# Altium PCB MT-CHARHER  V1.0.0.PcbDoc (part 1 of 2)
Units mm, origin at the board's own origin, x right, y up, seen from the top; angles counter-clockwise.
Board outline 160.02 x 112.01 mm, 2 copper layers (Top Layer, Bottom Layer); 298 components, 195 nets, 918 pads, 681 vias.
Unrouted connection lines stored in the file: 1.
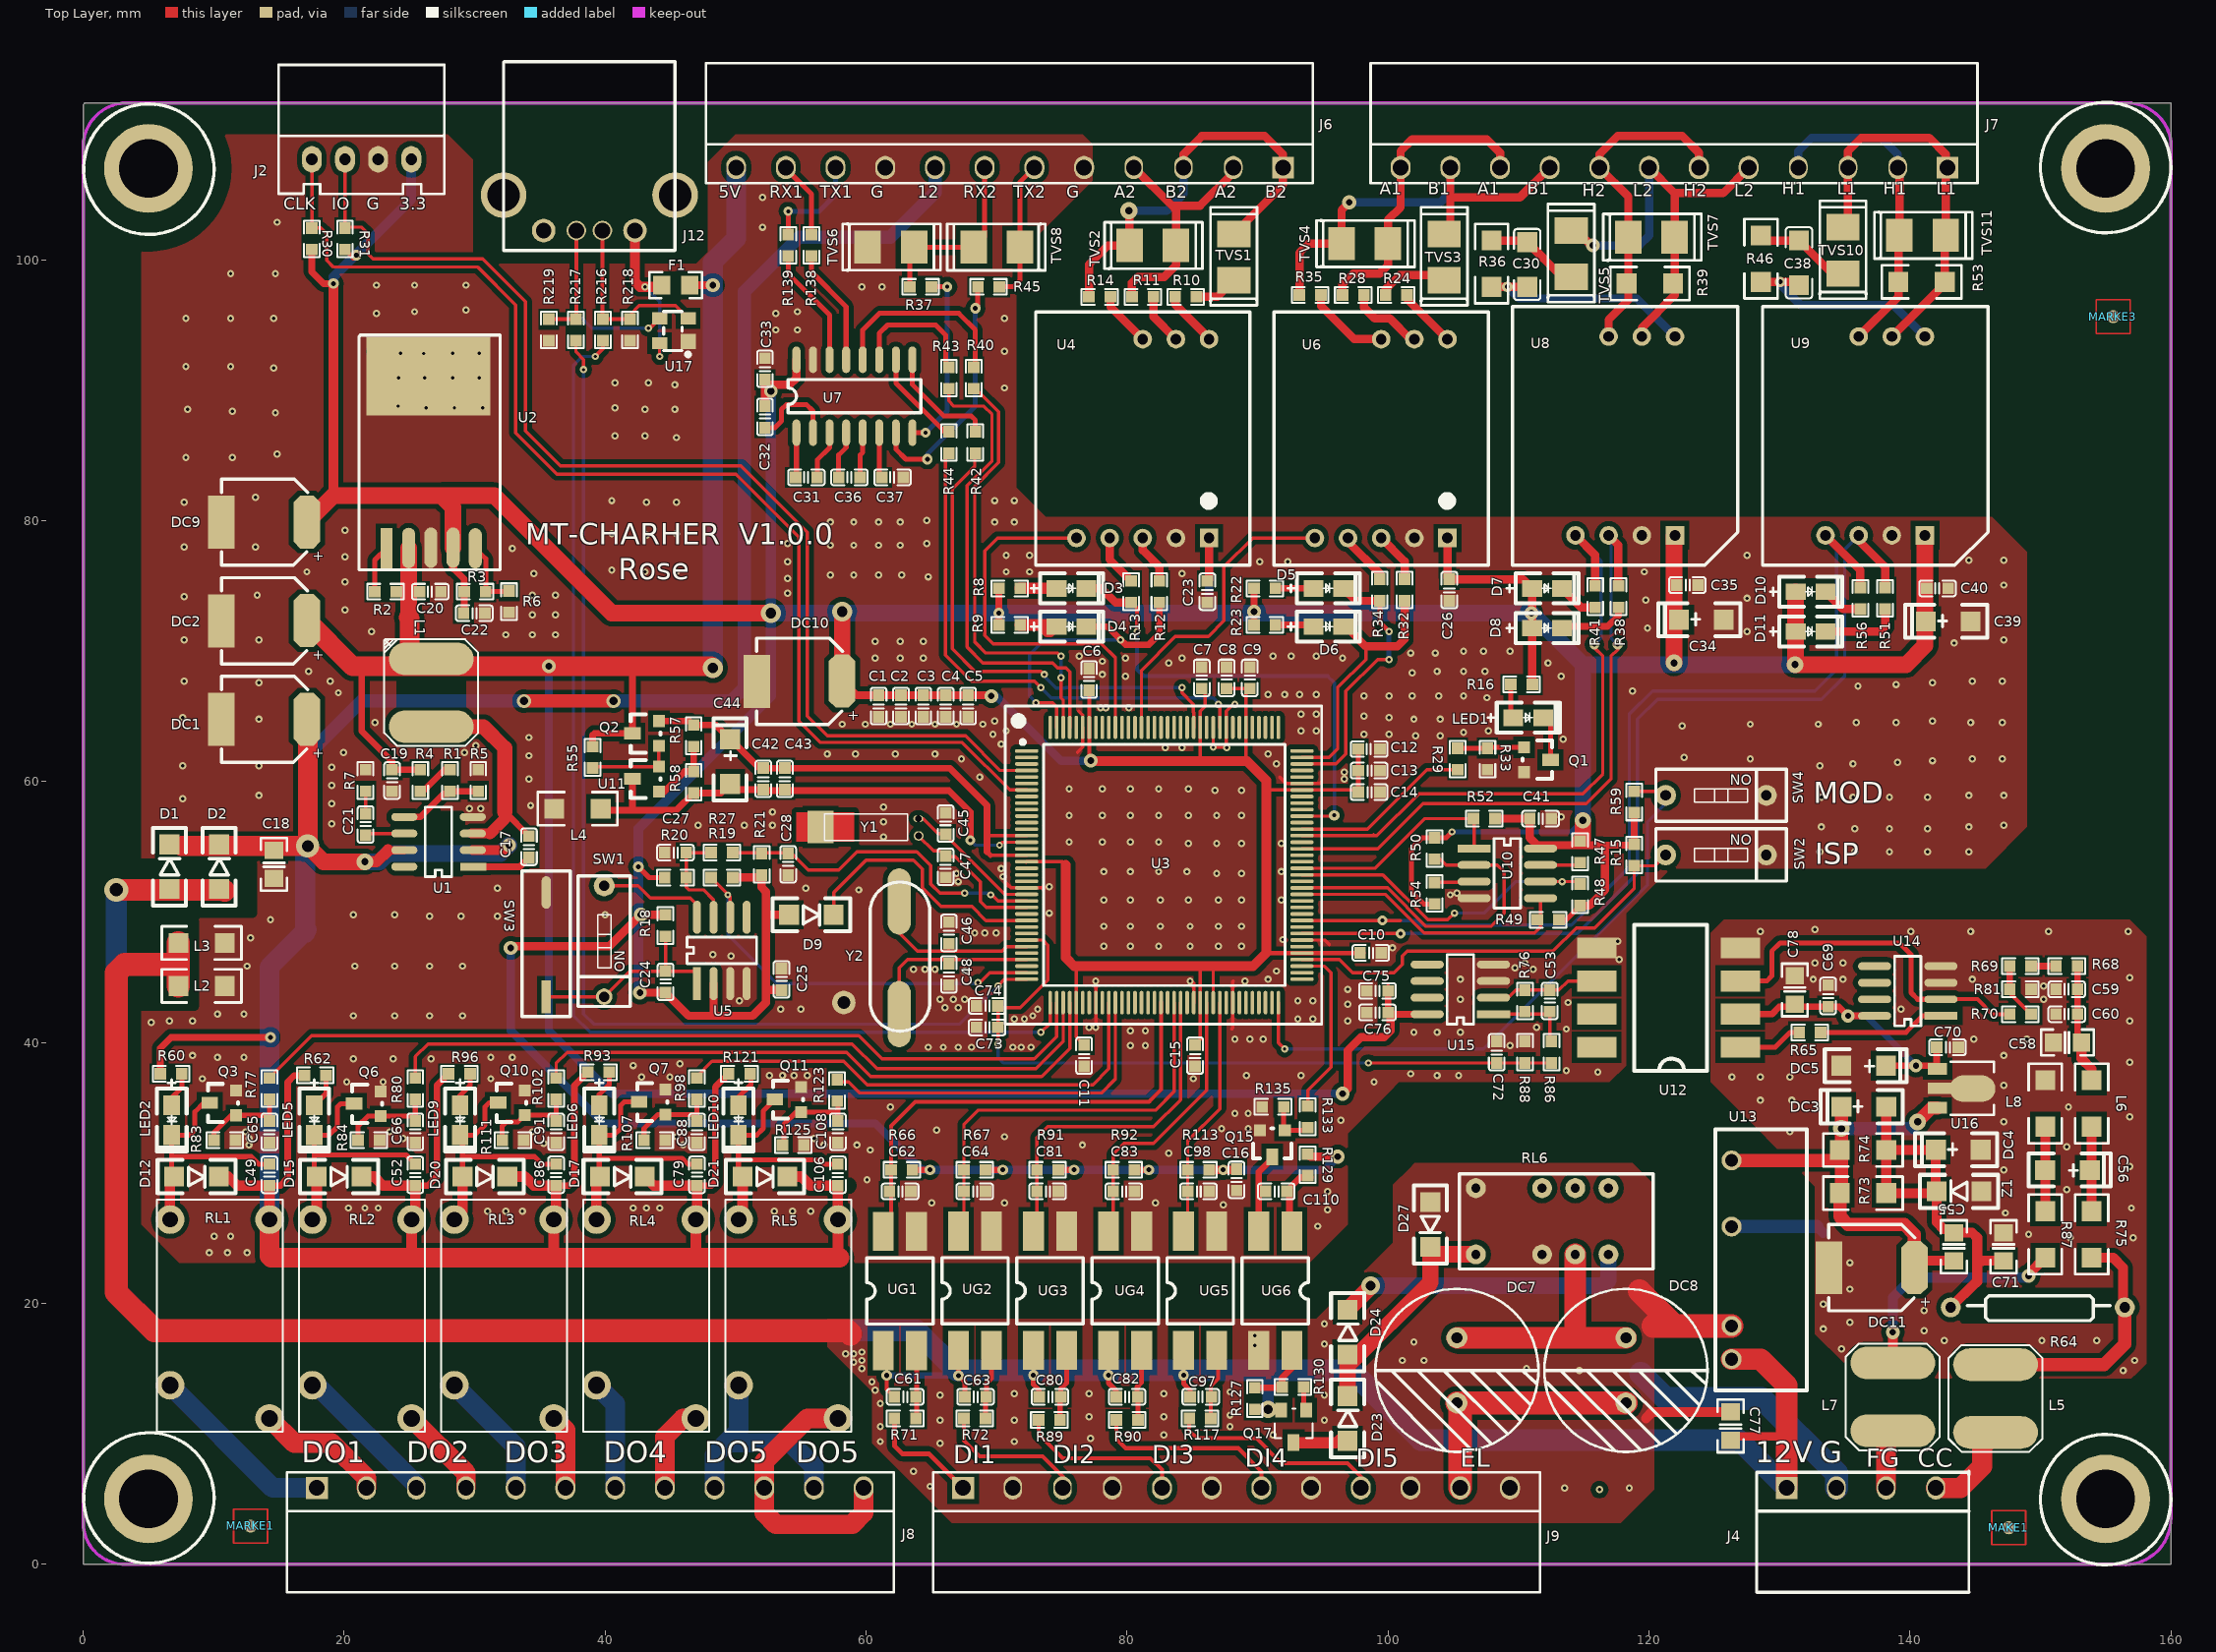
[diagram p0: Top Layer view]
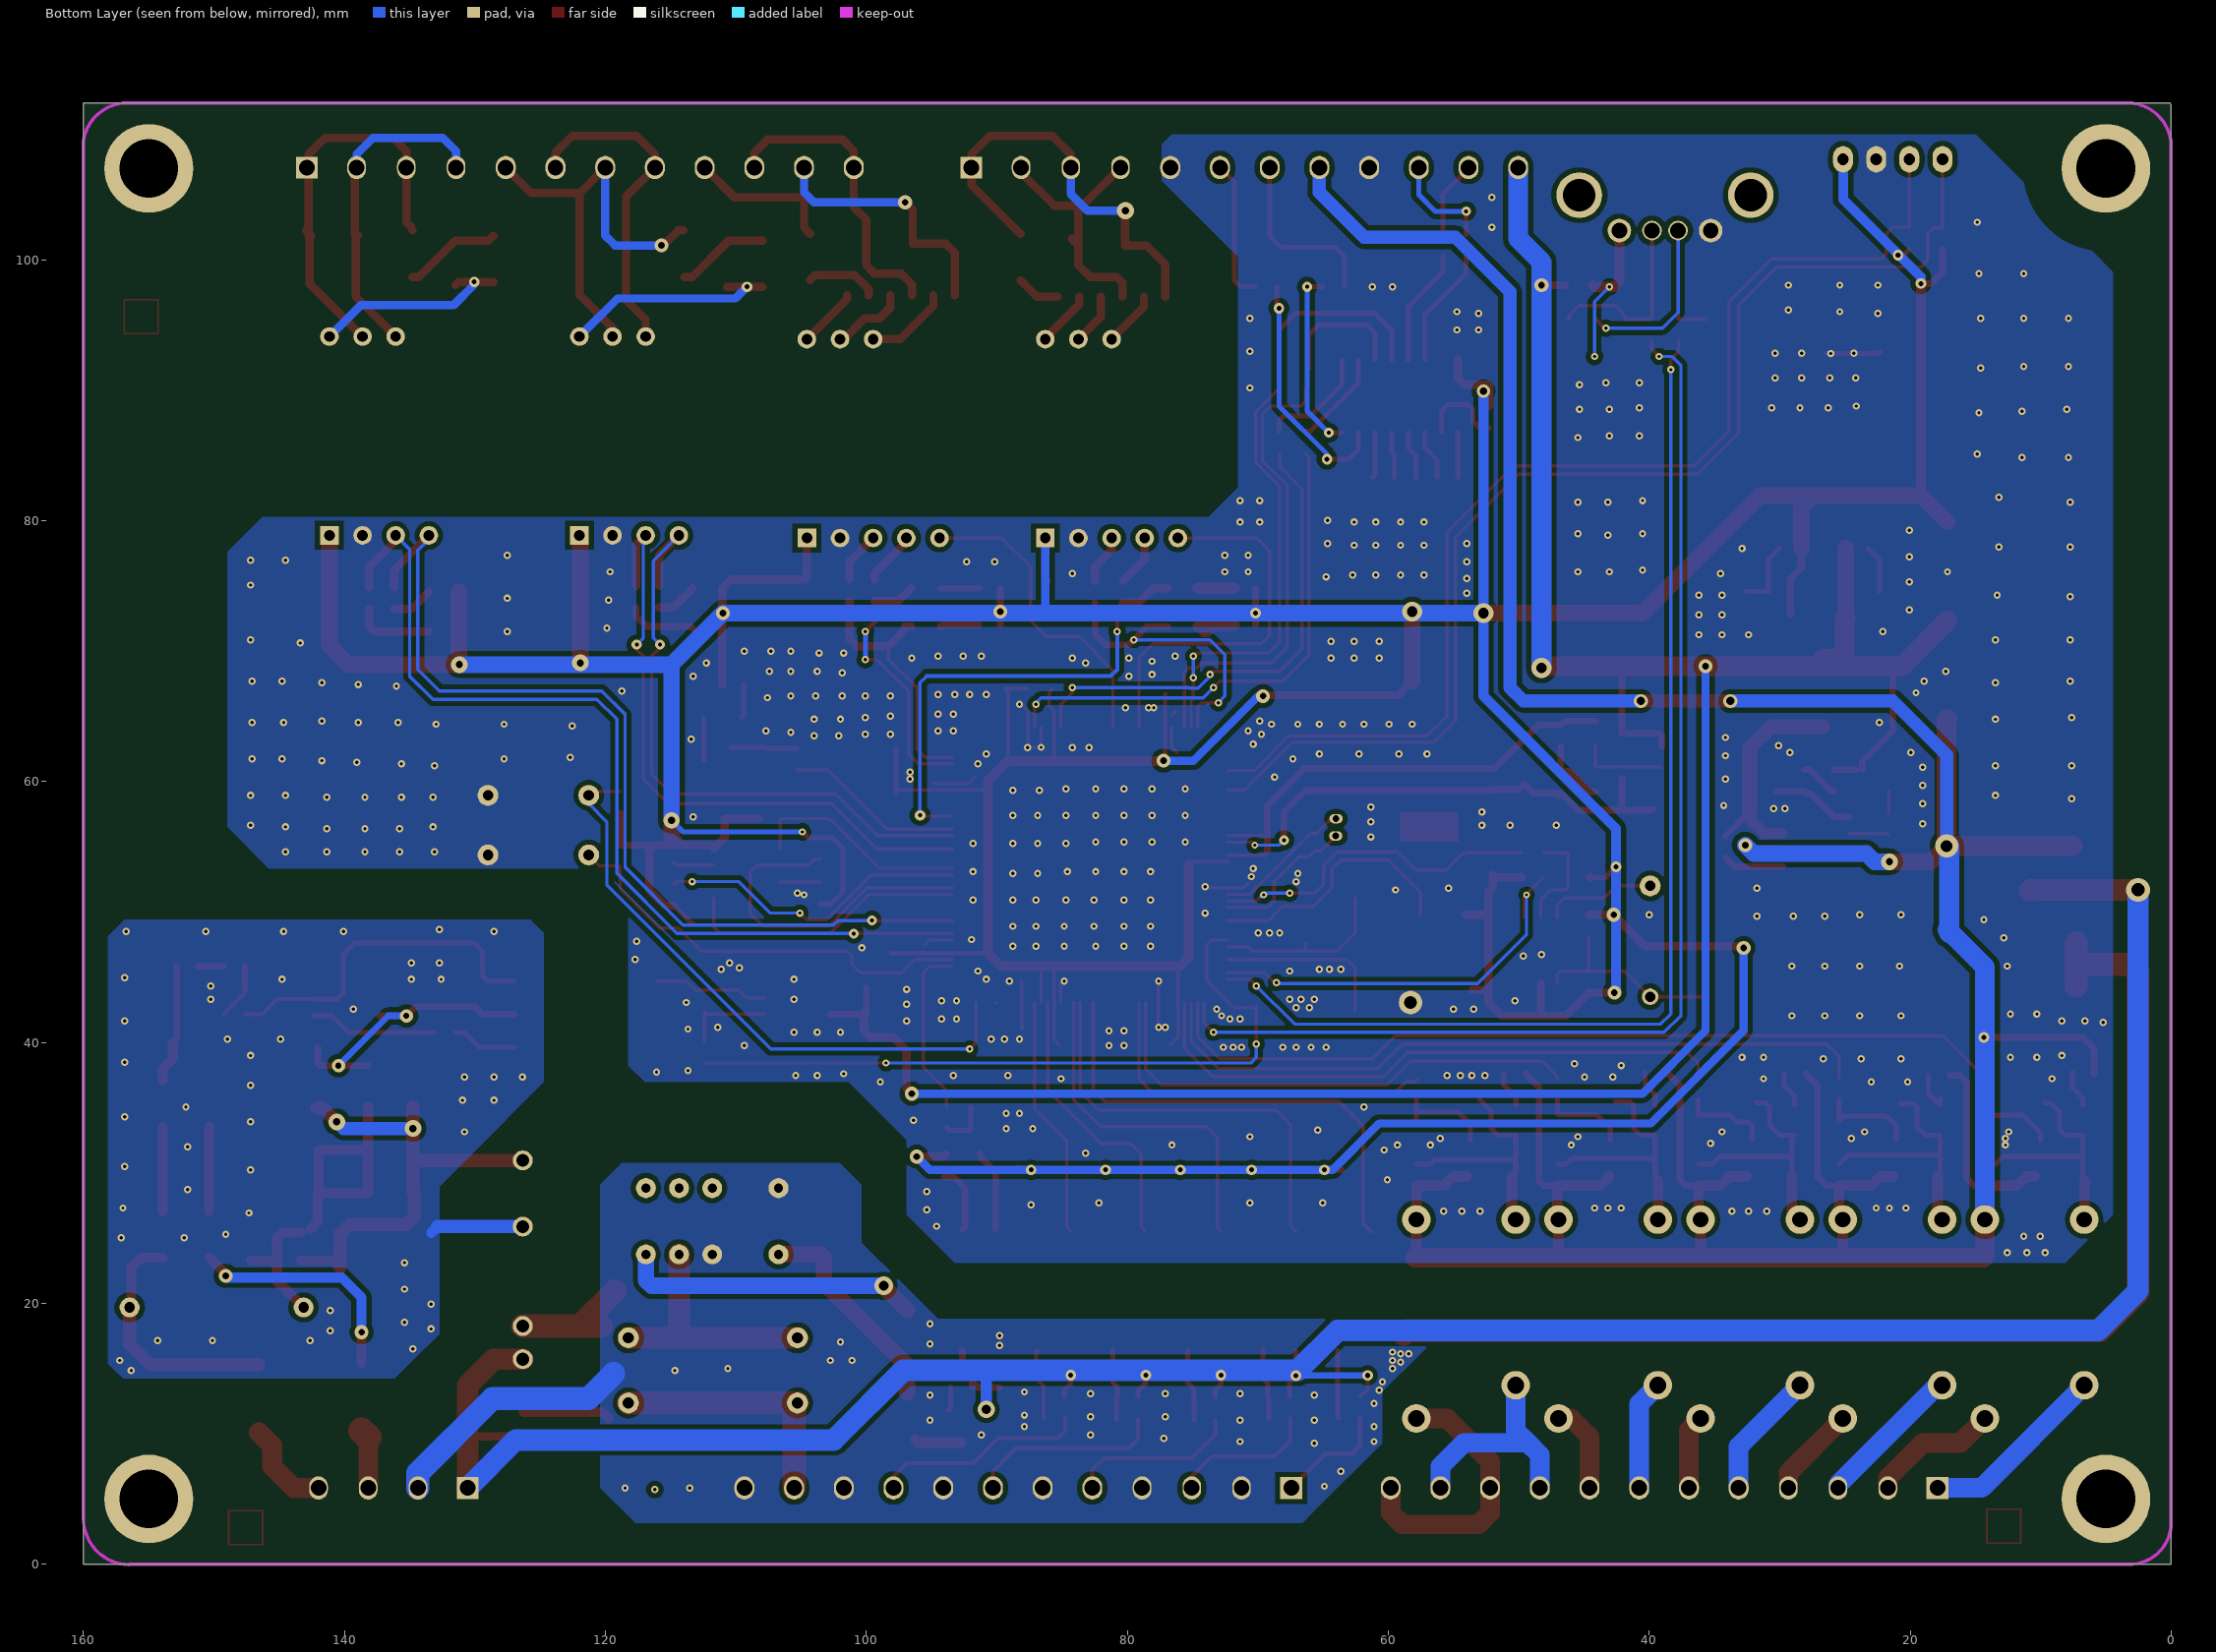
[diagram p1: Bottom Layer view, seen from below]

## Layer stack, top to bottom
Top Layer: signal copper 0.0356
Dielectric: dielectric 0.32, FR-4, Dk 4.8
Bottom Layer: signal copper 0.0356

## Board outline
10.033,112 26.924,112 159.879,112 159.893,112.014 160.02,112.014 160.02,105.791 160.02,0 151.13,0 0,0 0,5.588 0,111.887 0.127,112.014 0.141,112 3,112 10.033,112

## Design rules (kind name [scope] priority, off if disabled: settings)
Clearance [All] p1 off: gap=0.381
DiffPairsRouting [All] p1: maxlimit=2.54 minlimit=0.203 mostfreqgap=0.254 maxuncoupledlength=12.7
PlaneClearance [All] p1 off: clearance=0.508
PlaneConnect [All] p1 off: planeconnectstyle=Relief reliefexpansion=0.508 reliefentries=4 reliefconductorwidth=0.254 reliefairgap=0.254
PolygonConnect [All] p1: connectstyle=Direct reliefconductorwidth=0.254 reliefentries=4 polygonreliefangle="90 Angle" airgapwidth=0.254
RoutingVias [All] p1: holewidth=0.254 width=0.61 viastyle="Through Hole" minholewidth=0.203 minwidth=0.305 maxholewidth=1.27 maxwidth=2.032
SilkToSilkClearance [All] p1 off: silktosilkclearance=0.254
SilkToSolderMaskClearance [IsPad] p1 off: minsilkscreentomaskgap=0.254 clearancetoexposedcopper=TRUE
SolderMaskExpansion [All] p1: expansion=0.102
Width [All] p1: maxlimit=5 minlimit=0.254 preferedwidth=0.254 minimp=50.000000 maximp=50.000000 favimp=50.000000
23 further rules are at their usual default settings.

## Components (designator, comment, footprint, x,y, rotation, side; value= is the part's Value field where it differs from the comment)
C1 "104" 0603C 60.96,65.786 r270 top
C2 "104" 0603C 62.674,65.786 r270 top
C3 "104" 0603C 64.389,65.786 r270 top
C4 "104" 0603C 66.103,65.786 r270 top
C5 "104" 0603C 67.818,65.786 r270 top
C6 "104" 0603C 77.089,67.818 r90 top
C7 "104" 0603C 85.725,67.945 r90 top
C8 "104" 0603C 87.63,67.945 r90 top
C9 "104" 0603C 89.408,67.945 r90 top
C10 "104" 0603C 98.679,46.863 r0 top
C11 "104" 0603C 76.708,38.989 r270 top
C12 "104" 0603C 98.552,62.484 r180 top
C13 "104" 0603C 98.552,60.833 r0 top
C14 "104" 0603C 98.552,59.182 r0 top
C15 "104" 0603C 85.217,38.989 r270 top
C16 "103" 0603C 88.392,29.464 r270 top
C17 "103" 0603C 34.163,54.991 r270 top
C18 "0.1uF" 0805C 14.605,52.578 r90 top
C19 "104" 0603C 23.674,60.071 r90 top
C20 "104" 0603C 26.595,74.549 r180 top
C21 "3.9nF" 0603C 21.642,56.706 r90 top
C22 "104" 0603C 29.972,72.898 r0 top
C23 "104" 0603C 86.158,74.549 r270 top
C24 "104" 0603C 44.629,44.636 r90 top
C25 "104" 0603C 53.519,44.831 r90 top
C26 "104" 0603C 104.7,74.676 r270 top
C27 "104" 0603C 45.391,54.542 r0 top
C28 "104" 0603C 54.027,53.653 r90 top
C30 "103/2KV/1206" 1206C 110.669,101.346 r270 top
C31 "0.1uF" 0603C 55.424,83.312 r180 top
C32 "0.1uF" 0603C 52.249,87.947 r90 top
C33 "1uF" 0603C 52.249,91.63 r270 top
C34 "10uF" CA1206 122.301,72.39 r180 top
C35 "104" 0603C 122.936,75.057 r0 top
C36 "0.1uF" 0603C 58.726,83.312 r180 top
C37 "0.1uF" 0603C 62.028,83.312 r180 top
C38 "103/2KV/1206" 1206C 131.497,98.044 r90 top
C39 "10uF/16V" CA1206 141.224,72.263 r180 top
C40 "0.1uF" 0603C 142.113,74.803 r180 top
C41 "104" 0603C 111.685,57.15 r0 top
C42 "104" 0603C 52.122,60.198 r270 top
C43 "104" 0603C 53.773,60.198 r270 top
C44 "10uF/16V" CA1206 49.57,63.248 r90 top
C45 "22P" 0603C 66.092,56.769 r90 top
C46 "22P" 0603C 66.346,48.387 r90 top
C47 "22P" 0603C 66.092,53.467 r270 top
C48 "22P" 0603C 66.346,45.212 r270 top
C49 "104" 0603C 14.276,29.845 r90 top
C52 "104" 0603C 25.452,29.845 r270 top
C53 "103" 0603C 112.395,43.18 r90 top
C55 "104" 0805C 143.383,25.4 r270 top
C56 "10uF/16V" CA1206 153.797,30.226 r0 top
C58 "1uF" 0805C 151.003,40.005 r0 top
C59 "104" 0603C 152.019,44.069 r180 top
C60 "103" 0603C 152.019,42.164 r180 top
C61 "104" 0603C 62.992,12.827 r0 top
C62 "104" 0603C 62.611,28.575 r0 top
C63 "104" 0603C 68.389,12.827 r0 top
C64 "104" 0603C 68.326,28.575 r0 top
C65 "103" 0603C 14.276,33.147 r270 top
C66 "104" 0603C 25.452,33.147 r90 top
C69 "104" 0603C 133.731,43.561 r270 top
C70 "104" 0603C 142.875,39.624 r0 top
C71 "104" 0805C 147.193,25.4 r270 top
C72 "104" 0603C 108.331,39.243 r270 top
C73 "104" 0603C 69.278,41.148 r0 top
C74 "103" 0603C 69.278,42.799 r0 top
C75 "104" 0603C 99.187,43.942 r0 top
C76 "104" 0603C 99.187,42.291 r0 top
C77 "104" 0805C 126.238,9.525 r90 top
C78 "104" 0805C 131.191,45.085 r270 top
C79 "104" 0603C 47.042,29.845 r90 top
C80 "104" 0603C 74.093,12.827 r0 top
C81 "104" 0603C 73.914,28.575 r0 top
C82 "104" 0603C 79.998,12.827 r0 top
C83 "104" 0603C 79.756,28.575 r0 top
C86 "104" 0603C 36.247,29.845 r270 top
C88 "103" 0603C 47.042,33.147 r270 top
C91 "104" 0603C 36.247,33.147 r90 top
C97 "0.1uF" 0603C 85.65,12.827 r180 top
C98 "104" 0603C 85.471,28.575 r0 top
C106 "104" 0603C 57.837,29.845 r270 top
C108 "104" 0603C 57.837,33.147 r90 top
C110 "10nF" 0603C 91.44,28.575 r0 top
D1 "1N4007" 1206D 6.604,53.467 r90 top
D2 "1N4007" 1206D 10.414,53.467 r90 top
D3 "LED" D0805 74.599,74.812 r90 top
D4 "LED" D0805 74.601,71.882 r90 top
D5 "LED" D0805 94.284,74.812 r90 top
D6 "LED" D0805 94.286,71.882 r90 top
D7 "RED" D0805 111.048,74.812 r90 top
D8 "RED" D0805 111.048,71.764 r90 top
D9 "1N4148" 1206D 55.805,49.784 r0 top
D10 "LED" D0805 131.241,74.558 r90 top
D11 "LED" D0805 131.243,71.501 r90 top
D12 "1N4007" 1206D 8.688,29.718 r0 top
D15 "1N4007" 1206D 19.61,29.718 r0 top
D17 "1N4007" 1206D 41.327,29.718 r0 top
D20 "1N4007" 1206D 30.786,29.718 r0 top
D21 "1N4007" 1206D 52.249,29.718 r0 top
D23 "1N4007" 1206D 96.901,11.176 r90 top
D24 "1N4007" 1206D 96.901,17.78 r90 top
D27 "1N4007" 1206D 103.251,26.035 r270 top
DC1 "220uF/25V" C100UF16VEJ 17.145,64.77 r180 top
DC2 "220uF/25V" C100UF16VEJ 17.145,72.326 r180 top
DC3 "10uF,16V" CA1206 134.747,35.052 r180 top
DC4 "10uF,16V" CA1206 141.986,31.75 r180 top
DC5 "10uF,16V" CA1206 138.176,38.227 r0 top
DC7 "2000uF/25V" CAP12.5*20 105.283,14.859 r270 top
DC8 "2000uF/25V" CAP12.5*20 118.237,14.859 r270 top
DC9 "220uF/25V" C100UF16VEJ 17.145,79.883 r180 top
DC10 "100uF/16V" C100UF16VEJ 58.166,67.691 r180 top
DC11 "100uF/25V" C100UF16VEJ 140.335,22.733 r180 top
F1 "0.5A/0805" 0805R 46.482,98.044 r180 top
J2 "HEADER 4" COM-2.54mm-90 17.526,108.204 r0 top locked
J4 "HEADER 4" KF2EDG-4P-3.81mm 130.556,5.842 r0 top locked
J6 "J?" KF2EDG-12P-3.81mm 91.948,107.061 r180 top locked
J7 "J?" KF2EDG-12P-3.81mm 142.875,107.061 r180 top locked
J8 "J8" KF2EDG-12P-3.81mm 17.907,5.842 r0 top
J9 "J8" KF2EDG-12P-3.81mm 67.437,5.842 r0 top (schematic designator J8)
J12 "CON5" USB-A 42.291,102.235 r180 top locked
L1 "22uH" LC7*7*3_L 26.67,66.802 r90 top
L2 "1uH" 1206R 7.291,44.323 r0 top
L3 "1uH" 1206R 7.291,47.625 r0 top
L4 "1uH" 1206R 39.676,57.912 r180 top
L5 "1uH" LC7*7*3_L 146.558,12.7 r90 top
L6 "1uH" 1206R 153.924,33.528 r90 top
L7 "1uH" LC7*7*3_L 138.684,12.827 r90 top
L8 "1uH" 1206R 150.368,33.528 r90 top
LED1 "RED" D0805 109.601,64.897 r90 top
LED2 "RED" D0805 6.792,35.179 r0 top
LED5 "RED" D0805 17.714,35.179 r0 top
LED6 "RED" D0805 39.558,35.179 r0 top
LED9 "RED" D0805 28.89,35.179 r0 top
LED10 "RED" D0805 50.226,35.181 r0 top
MAKE1 "MARK1.0" MARK1.0 147.574,2.794 r90 top
MARKE1 "MARK1.0" MARK1.0 12.827,2.921 r90 top
MARKE3 "MARK1.0" MARK1.0 155.575,95.631 r90 top
Q1 "8050" SOT23 110.415,62.611 r270 top
Q2 "8050" SOT23 44.13,62.738 r90 top
Q3 "8050" SOT23 11.736,34.417 r90 top
Q6 "8050" SOT23 22.794,34.353 r90 top
Q7 "8050" SOT23 44.638,34.48 r90 top
Q10 "8050" SOT23 33.843,34.43 r90 top
Q11 "8050" SOT23 55.043,34.671 r90 top
Q15 "9013" SOT23 92.075,33.274 r180 top
Q17 "AO3407" SOT-23L 93.726,11.811 r180 top
R1 "1.2kΩ" 0603R 28.119,60.071 r270 top
R2 "4K7" 0603R 23.166,74.549 r180 top
R3 "2K/1%" 0603R 30.024,74.549 r180 top
R4 "43k" 0603R 25.833,60.071 r270 top
R5 "10k" 0603R 30.278,60.071 r90 top
R6 "1.2K/1%" 0603R 32.639,73.787 r90 top
R7 "6.8k" 0603R 21.642,60.071 r90 top
R8 "2K" 0603R 70.993,74.803 r180 top
R9 "2K" 0603R 70.993,72.009 r180 top
R10 "10R" 0603R 84.507,97.155 r0 top
R11 "10R" 0603R 81.205,97.155 r180 top
R12 "100R" 0603R 82.475,74.549 r90 top
R13 "100R" 0603R 80.316,74.549 r90 top
R14 "10R" 0603R 77.903,97.155 r180 top
R15 "10K" 0603R 118.872,54.356 r90 top
R16 "10K" 0603R 110.236,67.437 r0 top
R18 "10K" 0603R 44.629,48.954 r90 top
R19 "10K" 0603R 48.947,52.637 r180 top
R20 "10K" 0603R 45.391,52.637 r0 top
R21 "10K" 0603R 51.995,53.653 r90 top
R22 "2K" 0603R 90.551,74.803 r180 top
R23 "2K" 0603R 90.551,72.009 r180 top
R24 "10R" 0603R 100.636,97.282 r180 top
R27 "1kR" 0603R 48.947,54.542 r0 top
R28 "10R" 0603R 97.334,97.282 r180 top
R29 "10K" 0603R 105.335,61.722 r90 top
R30 "10K" 0603R 17.526,101.6 r270 top
R31 "10K" 0603R 20.066,101.6 r270 top
R32 "100R" 0603R 101.271,74.676 r90 top
R33 "10K" 0603R 107.621,61.722 r90 top
R34 "100R" 0603R 99.366,74.676 r90 top
R35 "10R" 0603R 94.032,97.282 r180 top
R36 "1M" 1206R 107.94,101.481 r270 top
R37 "10R" 0603R 64.187,97.917 r180 top
R38 "2k" 0603R 117.654,74.168 r90 top
R39 "120R" 1206R 121.853,98.17 r180 top
R40 "0R" 0603R 68.251,90.932 r90 top
R41 "2k" 0603R 115.876,74.168 r90 top
R42 "0R" 0603R 68.378,85.979 r90 top
R43 "0R" 0603R 66.346,90.932 r90 top
R44 "0R" 0603R 66.346,85.979 r90 top
R45 "10R" 0603R 69.394,97.917 r0 top
R46 "1M" 1206R 128.575,98.29 r90 top
R47 "10K" 0603R 114.733,54.61 r270 top
R48 "10K" 0603R 114.733,51.308 r90 top
R49 "10K" 0603R 112.268,49.403 r180 top
R50 "10K" 0603R 103.557,54.864 r270 top
R51 "2k" 0603R 138.101,74.041 r90 top
R52 "10K" 0603R 107.367,57.15 r180 top
R53 "120R" 1206R 142.681,98.297 r180 top
R54 "10K" 0603R 103.557,51.435 r90 top
R55 "2K" 0603R 39.041,61.849 r90 top
R56 "2k" 0603R 136.196,74.041 r90 top
R57 "3.3k1%" 0603R 46.788,63.5 r90 top
R58 "10k1%" 0603R 46.788,59.944 r90 top
R59 "10K" 0603R 118.872,58.42 r270 top
R60 "10K" 0603R 6.731,37.592 r180 top
R62 "10K" 0603R 17.78,37.465 r180 top
R64 "1K/1W" R1-1 156.464,19.685 r180 top
R65 "200R/1%" 0603R 132.334,40.767 r180 top
R66 "10K" 0603R 62.738,30.226 r180 top
R67 "10K" 0603R 68.326,30.226 r180 top
R68 "33K/1%" 0603R 152.019,45.847 r180 top
R69 "33K/1%" 0603R 148.463,45.847 r180 top
R70 "31K6/1%" 0603R 148.463,42.164 r180 top
R71 "10K" 0603R 62.992,11.176 r0 top
R72 "10K" 0603R 68.326,11.176 r0 top
R73 "120R" 1206R 134.62,28.448 r0 top
R74 "120R" 1206R 134.62,31.75 r0 top
R75 "" 1206R 153.924,23.495 r90 top
R76 "100k/1%" 0603R 110.49,43.18 r90 top
R77 "5.1K" 0603R 14.276,36.449 r270 top
R80 "5.1K" 0603R 25.452,36.449 r270 top
R81 "33K/1%" 0603R 148.463,44.069 r180 top
R83 "4.7K" 0603R 10.847,32.512 r180 top
R84 "4.7K" 0603R 21.896,32.512 r180 top
R86 "10K/1%" 0603R 112.522,39.243 r270 top
R87 "120R" 1206R 150.368,23.495 r90 top
R88 "20K/1%" 0603R 110.49,39.243 r90 top
R89 "10K" 0603R 74.041,11.049 r0 top
R90 "10K" 0603R 80.01,11.049 r0 top
R91 "10K" 0603R 73.914,30.226 r180 top
R92 "10K" 0603R 79.756,30.226 r180 top
R93 "10K" 0603R 39.497,37.719 r180 top
R96 "10K" 0603R 28.829,37.592 r180 top
R98 "5.1K" 0603R 47.042,36.449 r270 top
R102 "5.1K" 0603R 36.247,36.449 r270 top
R107 "4.7K" 0603R 43.803,32.512 r180 top
R111 "4.7K" 0603R 32.945,32.512 r180 top
R113 "10K" 0603R 85.471,30.226 r180 top
R117 "10K" 0603R 85.598,11.176 r0 top
R121 "10K" 0603R 50.292,37.592 r180 top
R123 "5.1K" 0603R 57.785,36.322 r270 top
R125 "4.7K" 0603R 54.408,32.131 r180 top
R127 "10K" 0603R 89.789,12.7 r270 top
R129 "1K" 0603R 93.853,30.607 r270 top
R130 "5.1K" 0603R 92.71,13.589 r0 top
R133 "3K" 0603R 93.853,34.29 r270 top
R135 "10k" 0603R 91.186,35.052 r0 top
R138 "10R" 0603R 55.805,101.092 r90 top
R139 "10R" 0603R 54.027,101.092 r90 top
R216 "33R" 0603R 39.836,94.615 r270 top
R217 "33R" 0603R 37.761,94.615 r270 top
R218 "15K" 0603R 41.91,94.615 r90 top
R219 "15K" 0603R 35.687,94.615 r90 top
RL1 "JQ1P-24V" HF32F-12V 7.672,26.416 r90 top locked
RL2 "JQ1P-24V" HF32F-12V 18.566,26.416 r90 top locked
RL3 "JQ1P-24V" HF32F-12V 29.46,26.416 r90 top locked
RL4 "JQ1P-24V" HF32F-12V 40.353,26.416 r90 top locked
RL5 "JQ1P-24V" HF32F-12V 51.247,26.416 r90 top locked
RL6 "G6S-2" G6S-2 106.732,28.829 r0 top
SW1 "SW SPST" SW1#1 39.919,43.487 r0 top
SW2 "SW SPST" SW1#2 129.794,54.356 r90 top
SW3 "按键" SW 35.493,43.5 r90 top
SW4 "SW SPST" SW1#2 129.794,58.928 r90 top
TVS1 "BA301N" 3528TVS 88.19,98.425 r270 top
TVS2 "BA301N" 3528TVS 80.191,101.086 r180 top
TVS3 "BA301N" 3528TVS 104.319,98.425 r270 top
TVS4 "BA301N" 3528TVS 96.445,101.219 r180 top
TVS5 "BA301N" 3528TVS 114.046,98.679 r270 top
TVS6 "BA301N" 3528TVS 60.125,100.959 r180 top
TVS7 "BA301N" 3528TVS 118.418,101.721 r180 top
TVS8 "BA301N/NC" 3528TVS 71.807,100.965 r0 top
TVS10 "BA301N" 3528TVS 134.874,98.933 r270 top
TVS11 "BA301N" 3528TVS 139.192,101.854 r180 top
U1 "EUP3484" SOP8#1 29.764,53.473 r180 top
U2 "MIC29302" TO5B 23.238,77.873 r90 top
U3 "LPC1778FBD144" LC-LQFP-144_20x20x05P 82.856,53.594 r270 top locked
U4 "RSM485S_CTM8251T" RSM485 86.285,78.664 r180 top locked
U5 "SP706SEN" SOP8#2 47.048,44.515 r90 top
U6 "RSM485S_CTM8251T" RSM485 104.556,78.664 r180 top locked
U7 "SP3232" SO-16 54.654,86.746 r90 top
U8 "CTM8251" CTM8251KT 121.989,78.867 r90 top locked
U9 "CTM8251" CTM8251KT 141.149,78.867 r90 top locked
U10 "FM25CL64" SOP8#2 106.611,54.858 r0 top
U11 "CJ431" SOT23 44.13,59.245 r90 top
U12 "HCNR201" HCNR201-SMD 127,39.624 r180 top
U13 "ZY1212FKS-2W" ZY1212FKS-2W 132.08,13.335 r90 top
U14 "LM358" SOP8#2 142.367,42.037 r180 top
U15 "LM358" SOP8#2 108.077,42.164 r180 top
U16 "LM78L05" SOT-89 142.113,37.973 r270 top
U17 "PRTR5V0U2X" SOT-143B 46.355,93.726 r90 top
UG1 "PS2501L-1" DIP-4 61.315,16.383 r180 top
UG2 "PS2501L-1" DIP-4 67.067,16.398 r180 top
UG3 "PS2501L-1" DIP-4 72.819,16.398 r180 top
UG4 "PS2501L-1" DIP-4 78.572,16.398 r180 top
UG5 "PS2501L-1" DIP-4 84.324,16.398 r180 top
UG6 "PS2501L-1" DIP-4 92.643,25.512 r0 top
Y1 "32.768KHz" ZS-32.768 64.008,57.15 r180 top
Y2 "12M" ZS_SMD 62.536,42.164 r90 top
Z1 "1N4741" 1206D 143.764,28.575 r180 top

## Footprints (in the part's own frame and the unit in brackets; to place one, negate y for a bottom-side part, rotate by r counter-clockwise, add the part's x,y. Pads: shape width x height; smd on the part's side, far side on the other; paste and mask are expansions set on the pad)
0603C [mil]
  rect 35x35 smd: 1(-32.5,0) 2(32.5,0)
  silkscreen extent -55,-24 55,24
0603R [mil]
  rect 35x35 smd: 1(-32.5,0) 2(32.5,0)
  silkscreen extent -55,-24 55,24
0805C [mil]
  rect 52x56 smd: 1(-0.58,-0.68) 2(84.42,-0.68)
  silkscreen extent -38,-40 121,38
0805R [mil]
  rect 52x56 smd: 1(0,0) 2(85,0)
  silkscreen extent -37,-39 122,39
1206C [mil]
  rect 60x60 smd: 1(0,0) 2(135,0)
  silkscreen extent -40,-40 175,40
1206D [mil]
  rect 60x60 smd: 1(-67.5,0) 2(67.5,0)
  silkscreen extent -118,-50 118,50
1206R [mil]
  rect 60x60 smd: 1(0.33,-0.04) 2(140.33,-0.04)
  silkscreen extent -50,-50 190,50
3528TVS [mil]
  rect 80x100 smd: 1(0.09,-0.25) 2(-139.91,-0.25)
  silkscreen extent -220,-70 76,70
C100UF16VEJ [mil]
  oct 80x160 smd: 1(-0.01,-0.43)
  rect 80x160 smd: 2(257.94,0.35)
  silkscreen extent -2,-130 258,130
CA1206 [mil]
  rect 60x60 smd: 1(-0.08,-0.48) 2(-135.08,-0.48)
  silkscreen extent -185,-50 62,50
CAP12.5*20 [mm]
  round 1.6 hole 0.85: 1(-2.5,0) 2(2.5,0)
  silkscreen extent -6.25,-6.25 6.25,6.25
COM-2.54mm-90 [mil]
  oval 60x80 hole 35: 1(0,-20) 2(100,-20) 3(200,-20) 4(300,-20)
  silkscreen extent -100,-125 400,265, body extent -28,-60 334,20, height 264
CTM8251KT [mil]
  rect 56x56 hole 32: 1(0,0)
  round 56 hole 32: 2(0,100) 3(0,200) 4(0,300) 6(600,200) 7(600,100) 8(600,0)
  silkscreen extent -90,-190 690,490, body extent -90,-190 690,490, height 276
D0805 [mil]
  rect 50x60 smd: 1(-0.34,-0.09) 2(-0.34,-90.09)
  silkscreen extent -45,-140 45,77
DIP-4 [mm]
  rect 1.6x3 smd: 1(-0.008,0.015) 2(-2.548,0.015) 3(-2.548,-9.129) 4(-0.008,-9.129)
  silkscreen extent -3.82,-7.1 1.26,-2.02
G6S-2 [mil]
  round 60 hole 27.56: 1(0,-200) 3(200,-200) 4(300,-200) 5(400,-200) 8(400,0) 9(300,0) 10(200,0) 12(0,0)
  silkscreen extent -50,-244 535,43
HCNR201-SMD [mm]
  rect 3x1.6 smd: 1(0,0) 2(0,-2.54) 3(0,-5.08) 4(0,-7.62) 5(11,-7.62) 6(11,-5.08) 7(11,-2.54) 8(11,0)
  silkscreen extent 2.54,-9.4 8.13,1.8
HF32F-12V [mm]
  round 2.2 hole 1.2: 1(0,1.016) 2(0,-6.604)
  round 2.2 hole 1.3: 3(-12.7,1.016) 4(-15.24,-6.604)
  silkscreen extent -16.26,-7.62 1.52,2.03
KF2EDG-4P-3.81mm [mil]
  rect 66x66 hole 47.24: 1(0,0)
  oval 56x70 hole 47.24: 2(150,0) 3(300,0) 4(450,0)
  silkscreen extent -91,-315 550,50
KF2EDG-12P-3.81mm [mil]
  rect 66x66 hole 47.24: 1(0,0)
  oval 56x70 hole 47.24: 2(150,0) 3(300,0) 4(450,0)
  oval 60x70 hole 47.24: 5(600,0) 6(750,0) 7(900,0) 8(1050,0) 9(1200,0) 10(1350,0) 11(1500,0) 12(1650,0)
  silkscreen extent -91,-315 1741,47
LC7*7*3_L [mm]
  oval 2.5x6.5 smd: 1(-2.6,0) 2(2.6,0)
  Top Layer pour cut-out: -1.803,2.705 1.854,2.705 1.854,-2.705 -1.803,-2.705
  silkscreen extent -4.09,-3.61 4.09,3.61, body extent -2.46,-2.4 1.85,2.4, height 3.5
LC-LQFP-144_20x20x05P [mm]
  oval 0.28x1.8 smd mask+0.051: 1(-8.75,-10.55) 2(-8.25,-10.55) 3(-7.75,-10.55) 4(-7.25,-10.55) 5(-6.75,-10.55) 6(-6.25,-10.55) 7(-5.75,-10.55) 8(-5.25,-10.55) 9(-4.75,-10.55) 10(-4.25,-10.55) 11(-3.75,-10.55) 12(-3.25,-10.55) 13(-2.75,-10.55) 14(-2.25,-10.55) 15(-1.75,-10.55) 16(-1.25,-10.55) 17(-0.75,-10.55) 18(-0.25,-10.55) 19(0.25,-10.55) 20(0.75,-10.55) 21(1.25,-10.55) 22(1.75,-10.55) 23(2.25,-10.55) 24(2.75,-10.55) 25(3.25,-10.55) 26(3.75,-10.55) 27(4.25,-10.55) 28(4.75,-10.55) 29(5.25,-10.55) 30(5.75,-10.55) 31(6.25,-10.55) 32(6.75,-10.55) 33(7.25,-10.55) 34(7.75,-10.55) 35(8.25,-10.55) 36(8.75,-10.55) 73(8.75,10.55) 74(8.25,10.55) 75(7.75,10.55) 76(7.25,10.55) 77(6.75,10.55) 78(6.25,10.55) 79(5.75,10.55) 80(5.25,10.55) 81(4.75,10.55) 82(4.25,10.55) 83(3.75,10.55) 84(3.25,10.55) 85(2.75,10.55) 86(2.25,10.55) 87(1.75,10.55) 88(1.25,10.55) 89(0.75,10.55) 90(0.25,10.55) 91(-0.25,10.55) 92(-0.75,10.55) 93(-1.25,10.55) 94(-1.75,10.55) 95(-2.25,10.55) 96(-2.75,10.55) 97(-3.25,10.55) 98(-3.75,10.55) 99(-4.25,10.55) 100(-4.75,10.55) 101(-5.25,10.55) 102(-5.75,10.55) 103(-6.25,10.55) 104(-6.75,10.55) 105(-7.25,10.55) 106(-7.75,10.55) 107(-8.25,10.55) 108(-8.75,10.55)
  oval 1.8x0.28 smd mask+0.051: 37(10.55,-8.75) 38(10.55,-8.25) 39(10.55,-7.75) 40(10.55,-7.25) 41(10.55,-6.75) 42(10.55,-6.25) 43(10.55,-5.75) 44(10.55,-5.25) 45(10.55,-4.75) 46(10.55,-4.25) 47(10.55,-3.75) 48(10.55,-3.25) 49(10.55,-2.75) 50(10.55,-2.25) 51(10.55,-1.75) 52(10.55,-1.25) 53(10.55,-0.75) 54(10.55,-0.25) 55(10.55,0.25) 56(10.55,0.75) 57(10.55,1.25) 58(10.55,1.75) 59(10.55,2.25) 60(10.55,2.75) 61(10.55,3.25) 62(10.55,3.75) 63(10.55,4.25) 64(10.55,4.75) 65(10.55,5.25) 66(10.55,5.75) 67(10.55,6.25) 68(10.55,6.75) 69(10.55,7.25) 70(10.55,7.75) 71(10.55,8.25) 72(10.55,8.75) 109(-10.55,8.75) 110(-10.55,8.25) 111(-10.55,7.75) 112(-10.55,7.25) 113(-10.55,6.75) 114(-10.55,6.25) 115(-10.55,5.75) 116(-10.55,5.25) 117(-10.55,4.75) 118(-10.55,4.25) 119(-10.55,3.75) 120(-10.55,3.25) 121(-10.55,2.75) 122(-10.55,2.25) 123(-10.55,1.75) 124(-10.55,1.25) 125(-10.55,0.75) 126(-10.55,0.25) 127(-10.55,-0.25) 128(-10.55,-0.75) 129(-10.55,-1.25) 130(-10.55,-1.75) 131(-10.55,-2.25) 132(-10.55,-2.75) 133(-10.55,-3.25) 134(-10.55,-3.75) 135(-10.55,-4.25) 136(-10.55,-4.75) 137(-10.55,-5.25) 138(-10.55,-5.75) 139(-10.55,-6.25) 140(-10.55,-6.75) 141(-10.55,-7.25) 142(-10.55,-7.75) 143(-10.55,-8.25) 144(-10.55,-8.75)
  silkscreen extent -12.19,-12.19 12.19,12.07
MARK1.0 [mm]
  round 1 smd mask+0.5: 1(0,0)
  Top Layer lines w0.127: -1.3,1.3 -1.3,-1.3 1.3,-1.3 1.3,1.3 -1.3,1.3
R1-1 [mil]
  round 60 hole 31.5: 1(0,0) 2(525,0)
  silkscreen extent 45,-35 475,40
RSM485 [mil]
  rect 56x56 hole 32: 1(0,0)
  round 56 hole 32: 2(100,0) 3(200,0) 4(300,0) 5(400,0) 8(200,-600) 9(100,-600) 10(0,-600)
  silkscreen extent -123,-682 523,82
SO-16 [mil]
  oval 80x24 smd: 1(-0.2,-0.3) 2(-0.2,-50.3) 3(-0.2,-100.3) 4(-0.2,-150.3) 5(-0.2,-200.3) 6(-0.2,-250.3) 7(-0.2,-300.3) 8(-0.2,-350.3) 9(219.8,-350.3) 10(219.8,-300.3) 11(219.8,-250.3) 12(219.8,-200.3) 13(219.8,-150.3) 14(219.8,-100.3) 15(219.8,-50.3) 16(219.8,-0.3)
  silkscreen extent 60,-375 160,25
SOP8#1 [mm]
  rect 2x0.6 smd: 1(-0.123,0.006)
  oval 2x0.6 smd: 2(-0.093,-1.264) 3(-0.093,-2.534) 4(-0.093,-3.804) 5(5.157,-3.804) 6(5.157,-2.534) 7(5.157,-1.264) 8(5.157,0.006)
  silkscreen extent 1.52,-4.57 3.55,0.77
SOP8#2 [mm]
  rect 2.54x0.6 smd: 1(-0.006,0.006)
  oval 2.54x0.6 smd: 2(-0.006,-1.264) 3(-0.006,-2.534) 4(-0.006,-3.804) 5(5.074,-3.804) 6(5.074,-2.534) 7(5.074,-1.264) 8(5.074,0.006)
  silkscreen extent 1.52,-4.57 3.55,0.77
SOT23 [mil]
  rect 36x36 smd: 1(-0.49,0.35) 3(74.51,0.35)
  rect 36x50 smd: 2(37.51,80.35)
  silkscreen extent -20,-5 95,85
SOT-23L [mm]
  rect 0.9x1.1 smd: 1(0,0) 3(1.905,0)
  rect 0.914x1.27 smd: 2(0.965,2.5)
  silkscreen extent -0.51,-0.13 2.41,2.16
SOT-89 [mm]
  rect 0.9x1.473 smd: 1(0,0.006) 3(2.994,0.006)
  rect 0.9x2 smd: 2(1.494,0.273)
  oval 2.032x3.5 smd: 2(1.519,2.686)
  silkscreen extent -0.53,1.02 3.53,4.32
SOT-143B [mil]
  rect 46x46 smd: 1(0,0)
  rect 36x46 smd: 2(70,0) 3(70,86) 4(-5,86)
  silkscreen extent -45,-6 91,73
SW [mm]
  rect 2.5x0.7 smd: 1(-0.006,0.008)
  oval 2.5x0.7 smd: 2(7.994,0.008)
  silkscreen extent -1.53,-1.84 9.65,1.86
SW1#1 [mm]
  round 1.27 hole 0.8: 1(0.011,0.015)
  round 1.6 hole 0.8: 2(0.011,8.515)
  silkscreen extent -1.99,-0.74 2.01,9.26
SW1#2 [mm]
  round 1.6 hole 0.8: 1(0.011,0.793) 2(0.011,8.515)
  silkscreen extent -1.99,-0.74 2.01,9.26
TO5B [mm]
  rect 3.1x0.9 smd: 1(-0.001,-0.004)
  oval 3.1x1 smd: 2(0.024,-1.706) 3(0.05,-3.407) 4(0.05,-5.109) 5(-0.001,-6.811)
  rect 6x9.5 smd: 6(13.199,-3.204)
  silkscreen extent -1.65,-8.72 16.36,2.1
USB-A [mm]
  round 1.8 hole 1.2: 1(0,0) 4(7,0)
  round 1.5 hole 1.2: 2(2.5,0) 3(4.5,0)
  round 3.5 hole 2.5: 5(-3.07,-2.71) 5(10.07,-2.71)
  silkscreen extent -3.07,-12.95 10.07,1.52
ZS-32.768 [mil]
  oval 30x20 / inner oval 40x28 / far side oval 40x28 hole 20: 1(0.21,0.15)
  oval 30x28 / inner oval 40x28 / far side oval 40x28 hole 20: 2(-0.79,52.15)
  rect 78.74x98.42 smd: 3(295,25)
  silkscreen extent 33,-14 283,66
ZS_SMD [mil]
  oval 200x70 smd: 1(0,0) 2(340,0)
  silkscreen extent -51,-92 399,88
ZY1212FKS-2W [mm]
  round 1.524 hole 1: 1(2.38,5.75) 2(4.92,5.75) 5(12.54,5.75) 7(17.62,5.75)
  silkscreen extent 0,0 20,7

## Part data
C1 C2 C3 C4 C5 C6 C7 C8 C9 C10 C11 C12 C13 C14 C15 C16 C41 C45 C46 C47 C48 C77: library part CAP1
C17 C18 C21: library part CAP
C19 C20 C31 C32 C33 C35 C36 C37 C40 C42 C43 C49 C55 C58 C61 C62 C63 C64 C65 C71 C78 C79 C80 C81 C82 C83 C88 C97 C98 C110: library part CAP, "Capacitor"
C22 C24 C25 C27 C28: library part CAP1, "CAP"
C23 C26: library part CAP_1
C30 C38: library part 0.1uF, "C0603"
C34 C39 C44 C56 DC1 DC2 DC3 DC4 DC5 DC7 DC8 DC10: library part CAP2
C52 C66 C86 C91 C106 C108: library part Cap, "Capacitor"
C53 C59 C60 C69 C70 C72 C73 C74 C75 C76: library part CAP1, "Capacitor"
D1 D2 D9 D12 D15 D17 D20 D21 D23 D24 D27 Z1: library part DIODE
D7 D8 LED1 LED2 LED5 LED6 LED9 LED10: library part LED
DC9 DC11: library part "CAPACITOR POL", "Capacitor"
F1: library part FUSE1, "Fuse"
J2 J4: library part "4 HEADER", "4 Pin Header"
J6 J7 J8 J9: library part CON12
J12: "Connector"
L1 L2 L3 L4 L5 L6 L7 L8: library part INDUCTOR
MAKE1 MARKE1 MARKE3: library part CON1, "Connector"
Q1 Q2 Q3 Q6 Q7 Q10 Q11 Q15: library part NPN
Q17: library part PMOS
R1 R4 R5 R7 R64: library part R_S
R2 R3 R6 R16 R18 R19 R20 R21 R27 R29 R30 R31 R33 R47 R48 R49 R50 R52 R54 R55 R57 R58 R59 R60 R62 R65 R66 R67 R68 R69 R70 R71 R72 R76 R77 R80 R81 R83 R84 R86 R88 R89 R90 R91 R92 R93 R96 R98 R102 R107 R111 R113 R121 R123 R125 R127 R129 R130 R133 R135: library part RES1
R8 R9 R10 R11 R12 R13 R14 R15 R22 R23 R24 R28 R32 R34 R35 R37 R40 R42 R43 R44 R45 R117 R138 R139: library part RES-1, "RES"
R36 R38 R39 R41 R46 R51 R53 R56 R73 R74 R75 R87 R216 R217 R218 R219: library part RES2
RL1 RL2 RL3 RL4 RL5: library part JQ1P-12V
SW3: library part SW-PB
TVS1 TVS3 TVS5 TVS6 TVS10: library part TVS-D
TVS2 TVS4 TVS7 TVS8 TVS11: library part TVS
U3: library part LPC1778LQFP144
U7: library part MAX232ESE
U11: library part TL431, "TL431,SOT23/ST/ON"
U12: library part HCNR200
U14 U15: library part AS358P-E1
U16: library part LM7805
U17: library part PRTR5V0U2X_1
UG1 UG2 UG3 UG4 UG5 UG6: library part PS2501-1
Y1 Y2: library part CRYSTAL

## Free pads (board coordinates)
  round 0.508 hole 0.254: 0(49.403,51.308) 5(70.231,55.118)
  round 1.8 hole 1: 0(58.293,43.053)
  round 0.559 hole 0.254: 23(24.309,92.837) 24(26.087,92.804) 25(28.321,92.837) 26(24.182,90.932) 27(26.162,90.932) 28(28.321,90.932) 29(30.353,90.932)
  round 6.8 hole 4.5: 45(155,107) 46(155,5) 47(5,107) 48(5,5)

## Via types
v1: diameter 0.559, hole 0.254, Top Layer to Bottom Layer, 618 vias
v2: diameter 0.813, hole 0.381, Top Layer to Bottom Layer, 19 vias
v3: diameter 1.067, hole 0.508, Top Layer to Bottom Layer, 16 vias
v4: diameter 0.762, hole 0.305, Top Layer to Bottom Layer, 7 vias
v5: diameter 1.27, hole 0.559, Top Layer to Bottom Layer, 6 vias
v6: diameter 1.524, hole 0.813, Top Layer to Bottom Layer, 2 vias
v7: diameter 1.016, hole 0.457, Top Layer to Bottom Layer, 2 vias
v8: diameter 1.067, hole 0.635, Top Layer to Bottom Layer, 2 vias
v9: diameter 1.778, hole 0.914, Top Layer to Bottom Layer, 1 vias
v10: diameter 1.575, hole 0.762, Top Layer to Bottom Layer, 1 vias
v11: diameter 1.016, hole 0.559, Top Layer to Bottom Layer, 1 vias
v12: diameter 1.321, hole 0.711, Top Layer to Bottom Layer, 1 vias
v13: diameter 1.829, hole 1.016, Top Layer to Bottom Layer, 1 vias
v14: diameter 1.422, hole 0.762, Top Layer to Bottom Layer, 1 vias
v15: diameter 0.711, hole 0.305, Top Layer to Bottom Layer, 1 vias
v16: diameter 1.321, hole 0.559, Top Layer to Bottom Layer, 1 vias
v17: diameter 0.813, hole 0.305, Top Layer to Bottom Layer, 1 vias

## Nets (pads, with @x,y where several pads share a name; then routed paths per layer and width w, separated by ;. In a path a pad name is that pad's centre, name@x,y a point inside that pad or via, vN(x,y) a via of type N, cw(c..) or ccw(c..) an arc to the next point about the centre after c; other vN are vias at no path point)
12VS: C61.1 C63.1 C77.1 C80.1 C82.1 C97.2 D1.1 D2.1 J4.1 Q17.3 R127.2 U13.1 UG1.1 UG2.1 UG3.1 UG4.1 UG5.1 | length 210.4
  Top Layer w0.305: v2(61.583,14.467) 61.583,13.41 C61.1@62.166,12.827
  Top Layer w0.381: UG2.1@67.075,16.383 v2(67.075,14.459) 67.564,13.97 C63.1@67.564,12.827 ; v2(72.827,14.478) 72.827,13.787 73.267,13.347 C80.1@73.267,12.827 ; v2(78.579,14.478) 78.579,13.877 79.173,13.283 C82.1@79.173,12.827 ; v2(84.332,14.478) 84.332,13.839 84.824,13.347 C97.2@84.824,12.827
  Top Layer w0.635: C77.1@126.255,9.51 126.524,9.779 130.556,9.779
  Top Layer w1.651: v13(2.54,51.689) 10.783,51.689 D2.1@10.847,51.625 ; U13.1@126.33,15.715 128.557,15.715 130.556,13.716 130.556,9.779 J4.1@130.556,5.842
  Bottom Layer w0.508: v2(61.583,14.467) 67.067,14.467 v2(67.075,14.459)
  Bottom Layer w0.889: 90.678,14.859 90.805,14.732 v12(90.805,11.874)
  Bottom Layer w1.651: v13(2.54,51.689) 2.54,20.955 5.588,17.907 63.881,17.907 66.929,14.859 90.678,14.859 97.155,14.859 102.489,9.525 126.873,9.525 J4.1@130.556,5.842
485_CON1: U3.134 U4.5 | length 30
  Top Layer w0.254: U4.5@76.125,78.664 70.08,78.664 69.088,77.672 69.088,71.196 69.723,70.561 78.029,70.561 79.106,69.484 79.106,66.294 U3.134@79.106,64.144
485_CON2: U3.130 U6.5 | length 24.7
  Top Layer w0.254: U3.130@81.106,64.144 81.106,68.533 83.693,71.12 86.233,71.12 87.428,72.315 87.428,73.279 ; 87.428,73.66 87.428,73.279 ; U6.5@94.396,78.664 89.638,78.664 87.428,76.454 87.428,73.279
ADC1-switch: U3.42
ADC2-switch: U3.43
ADC_CC1: C72.2 C73.2 C74.2 R86.2 R88.1 U3.30 | length 55.6
  Top Layer w0.254: C74.2@70.072,42.767 70.104,42.735 C73.2@70.104,41.148 v1(70.104,39.878) ; C74.2@70.104,42.799 70.231,42.672 71.81,42.672 73.914,44.776 73.914,47.463 73.533,47.844 U3.30@72.306,47.844 ; v1(98.489,38.417) 107.188,38.417 109.982,38.417 R86.2@112.395,38.417
  Bottom Layer w0.254: v1(70.104,39.878) 70.104,38.862 70.549,38.417 v1(98.489,38.417)
ADC_CC2: U3.28
AGND: C42.2 C43.2 C44.2 L4.1 pad.5 R58.1 U3.15 U11.2 | length 40.1
  Top Layer w0.254: pad.5@70.231,55.118 70.457,55.344 70.763,55.344 ; 70.74,55.321 70.763,55.344 ; 71.247,55.344 70.763,55.344 ; U3.15@72.306,55.344 70.763,55.344
  Top Layer w0.508: L4.1@39.668,57.913 39.796,57.785 41.962,57.785 ; U11.2@42.089,60.198 42.089,58.42 42.089,57.912 41.962,57.785 ; R58.1@46.978,58.928 R58.1@46.788,59.118 ; v4(67.997,55.499) 67.997,57.658 66.727,58.928 66.346,59.309 52.185,59.309 C42.2@52.122,59.372 50.026,59.372 C44.2@49.582,59.817 48.883,59.118 R58.1@46.788,59.118 ; 41.962,57.785 42.724,57.785 45.454,57.785 R58.1@46.788,59.118
  Bottom Layer w0.254: v4(67.997,55.499) 68.378,55.118 pad.5@70.231,55.118
CAN_RD1: R56.2 U3.82 U9.4 | length 73.2
  Top Layer w0.254: U3.82@93.406,49.344 100.939,49.344
  Top Layer w0.635: U9.4@133.529,78.867 136.196,76.2 R56.2@136.196,74.867
  Bottom Layer w0.254: v4(99.568,49.344) 102.167,49.344 102.532,48.979 114.046,48.979 118.491,53.424 118.491,65.151 120.269,66.929 132.715,66.929 134.366,68.58 134.366,77.724 133.529,78.561 U9.4@133.529,78.867
CAN_RD2: R41.2 U3.95 U8.4 | length 49.3
  Top Layer w0.254: U3.95@93.406,55.844 98.822,55.844 ; 98.679,55.844 98.822,55.844 ; 98.894,55.916 98.822,55.844 ; v4(115.824,70.485) 115.824,70.231 116.459,69.596 116.459,60.579 114.935,59.055 102.362,59.055 99.151,55.844 98.822,55.844
  Top Layer w0.635: U8.4@114.369,78.867 115.876,77.36 R41.2@115.876,74.993
  Bottom Layer w0.254: U8.4@114.369,78.867 115.368,77.868 116.332,76.904 116.332,70.993 v4(115.824,70.485)
CAN_TD1: R51.2 U3.80 U9.3 | length 72.8
  Top Layer w0.254: U3.80@93.406,48.344 v4(100.953,48.344)
  Top Layer w0.635: U9.3@136.069,78.867 136.069,78.486 138.101,76.454 R51.2@138.101,74.867
  Bottom Layer w0.254: v4(100.953,48.344) 114.502,48.344 119.126,52.968 119.126,64.77 120.65,66.294 133.223,66.294 135.001,68.072 135.001,77.799 U9.3@136.069,78.867
CAN_TD2: R38.2 U3.93 U8.3 | length 49.3
  Top Layer w0.254: U3.93@93.406,54.844 99.219,54.844 100.128,55.753 102.668,58.293 115.189,58.293 117.094,60.198 117.094,69.596 117.602,70.104 v4(117.602,70.485)
  Top Layer w0.635: U8.3@116.909,78.867 117.654,78.122 R38.2@117.654,74.993
  Bottom Layer w0.254: U8.3@116.909,78.867 117.094,78.682 117.094,70.993 v4(117.602,70.485)
CANH1: J7.6 J7.8 R39.2 TVS7.1 U8.6 | length 25.9
  Top Layer w0.635: U8.6@116.909,94.107 116.909,95.394 118.416,96.901 TVS7.1@118.416,101.727 ; TVS7.1@118.416,101.219 TVS7.1@118.416,101.727 ; J7.6@123.825,107.061 123.825,108.204 122.555,109.474 117.602,109.474 116.205,108.077 J7.8@116.205,107.061 118.416,104.85 TVS7.1@118.416,101.727
CANH2: J7.2 J7.4 R53.2 TVS11.1 U9.6 | length 25.2
  Top Layer w0.635: U9.6@136.069,94.107 139.117,97.155 R53.2@139.117,98.298 139.117,101.731 TVS11.1@138.988,101.86 ; J7.2@139.065,107.061 139.19,106.936 TVS11.1@139.19,101.86
  Bottom Layer w0.635: J7.4@131.445,107.061 131.445,108.331 132.461,109.347 137.795,109.347 139.065,108.077 J7.2@139.065,107.061
CANL1: J7.5 J7.7 R39.1 TVS5.2 TVS7.2 U8.7 | length 33.3
  Top Layer w0.635: TVS5.2@114.04,102.233 114.429,102.233 115.57,101.092 v3(115.697,101.092) ; U8.7@119.449,94.107 119.449,94.759 121.972,97.282 TVS7.2@121.972,101.727 121.972,105.104 ; J7.7@120.015,107.061 121.972,105.104 ; J7.5@127.635,107.061 125.678,105.104 121.972,105.104
  Bottom Layer w0.635: v3(115.697,101.092) 119.253,101.092 120.015,101.854 J7.7@120.015,107.061
CANL2: J7.1 J7.3 R53.1 TVS10.2 TVS11.2 U9.7 | length 30.7
  Top Layer w0.635: TVS10.2@134.786,102.231 TVS10.2@134.793,102.233 ; TVS10.2@134.868,102.487 135.255,102.874 J7.3@135.255,107.061 135.255,108.331 136.271,109.347 141.478,109.347 142.746,108.079 TVS11.2@142.746,101.86 ; U9.7@138.609,94.107 142.673,98.171 R53.1@142.673,98.298 142.673,101.731 142.544,101.86 TVS11.2@142.927,102.244
CC1: J4.4 L5.1 | length 7.3
  Top Layer w1.524: J4.4@141.986,5.842 143.891,5.842 145.542,7.493 145.542,9.084 L5.1@146.558,10.1
DGND: C1.2 C2.2 C3.2 C4.2 C5.2 C6.2 C7.2 C8.2 C9.2 C10.2 C11.2 C12.1 C13.2 C14.2 C15.2 C16.2 C18.1 C19.1 C20.1 C22.2 C23.2 C25.2 C26.2 C27.1 C28.1 C33.1 C34.2 C35.2 C37.1 C39.2 C40.1 C41.2 C45.2 C46.2 C47.2 C48.2 C62.2 C64.2 C65.2 C66.1 C72.1 C73.1 C74.1 C75.1 C76.1 C81.2 C83.2 C88.2 C91.1 C98.2 C108.1 DC1.2 DC2.2 DC9.2 DC10.2 J2.3 J6.5 J6.9 J12.4 L2.2 L3.2 L4.2 pad.0@58.293,43.053 pad.23 pad.24 pad.25 pad.26 pad.27 pad.28 pad.29 Q1.3 Q3.3 Q6.3 Q7.3 Q10.3 Q11.3 Q15.3 R5.2 R6.1 R7.2 R33.1 R83.1 R84.1 R88.2 R107.1 R111.1 R125.1 R135.1 R218.1 R219.1 SW2.1 SW3.2 SW4.1 TVS6.1 U1.4 U2.3 U2.6 U3.22 U3.44 U3.59 U3.65 U3.79 U3.103 U3.117 U3.119 U3.139 U4.2 U5.3 U5.4 U6.2 U7.15 U8.2 U9.2 U10.4 U12.5 U15.3 U15.4 U17.1 UG1.3 UG2.3 UG3.3 UG4.3 UG5.3 | length 30.7
  Top Layer w0.254: 70.739,52.197 71.092,51.844 U3.22@72.306,51.844 73.759,51.844 ; 76.2,62.23 76.606,62.636 U3.139@76.606,64.144 ; 76.309,65.395 76.606,65.098 ; v1@77.606,41.411 U3.44@77.606,43.044 v1@77.606,44.695 ; v1@84.836,44.831 85.106,44.561 U3.59@85.106,43.044 ; U3.119@86.606,64.144 v1(86.606,62.619) 87.622,62.619 87.606,62.635 U3.117@87.606,64.144 87.606,65.381 88.138,65.913 v1(88.265,65.913) ; 88.011,41.021 88.106,41.116 U3.65@88.106,43.044 88.106,44.672 88.138,44.704 ; 91.694,60.325 92.175,59.844 U3.103@93.406,59.844 94.769,59.844 94.869,59.944 ; U3.79@93.406,47.844 95.158,47.844 95.504,47.498
  Top Layer w0.381: U2.6@22.277,92.964 22.437,92.804 U2.6@26.442,92.804
  other v1: 9.652,23.876 11.049,23.876 12.573,23.876 10.033,25.146 11.303,25.146 94.615,25.908 30.988,27.051 32.385,27.051 33.655,27.051 52.959,27.051 54.356,27.051 55.753,27.051 95.377,27.178 20.32,27.305 21.59,27.305 22.606,27.305 42.164,27.305 43.18,27.305 44.196,27.305 87.376,27.559 65.024,27.686 70.612,27.686 82.169,27.686 95.377,28.575 60.071,29.464 83.185,31.496 60.325,31.75 12.7,32.131 45.974,32.131 56.769,32.131 59.309,32.131 76.581,32.131 35.306,32.258 12.7,32.639 24.511,32.639 56.007,32.639 45.466,32.766 70.612,32.766 12.446,33.147 23.495,33.147 34.417,33.147 65.405,33.274 87.249,33.401 89.281,33.401 96.393,34.036 88.265,34.544 89.281,34.544 61.849,35.052 20.193,36.957 22.987,36.957 98.933,36.957 9.144,37.211 31.242,37.211 85.09,37.211 42.799,37.338 44.958,37.338 52.578,37.465 53.594,37.465 54.483,37.465 55.499,37.465 89.154,37.465 93.345,37.465 103.759,37.465 105.41,37.465 101.727,37.592 116.078,37.719 113.665,37.846 42.164,38.227 45.72,38.354 20.701,38.735 23.749,38.735 26.67,38.735 10.287,38.862 12.319,38.862 31.242,38.862 32.893,38.862 8.382,38.989 64.77,39.624 65.913,39.624 67.056,39.624 68.072,39.624 71.247,39.624 71.882,39.624 72.644,39.624 80.264,39.751 81.407,39.751 109.347,39.751 88.265,40.259 89.408,40.259 90.424,40.259 101.981,40.767 103.759,40.767 105.537,40.767 80.264,40.894 81.407,40.894 113.665,41.021 77.089,41.148 77.597,41.148 111.379,41.148 5.207,41.529 6.604,41.656 8.382,41.656 96.901,41.656 71.374,41.783 72.136,41.783 93.091,41.783 94.234,41.783 20.701,42.037 23.876,42.037 26.543,42.037 29.083,42.037 72.771,42.037 10.287,42.164 12.319,42.164 53.467,42.545 54.991,42.545 73.152,42.545 66.04,42.672 67.056,42.672 96.901,42.926 113.792,43.053 50.292,43.18 93.091,43.18 94.234,43.18 65.659,43.307 66.675,43.307 67.564,43.307 105.537,43.307 96.901,44.069 77.597,44.704 84.836,44.704 89.027,44.704 90.805,44.831 105.537,44.831 67.564,45.466 91.44,45.466 63.627,45.593 64.516,45.593 65.278,45.593 111.125,45.593 109.728,45.72 12.573,45.847 20.828,45.847 23.876,45.847 26.543,45.847 29.083,45.847 110.49,46.101 117.729,46.355 49.657,46.609 48.26,46.736 100.33,47.244 78.232,47.371 80.264,47.371 82.423,47.371 84.836,47.371 86.995,47.371 88.773,47.371 117.602,47.752 91.948,47.879 12.827,48.006 68.326,48.387 69.088,48.387 69.977,48.387 78.232,48.895 80.264,48.895 82.55,48.895 84.836,48.895 86.995,48.895 88.773,48.895 14.351,49.403 26.543,49.657 28.956,49.657 31.75,49.657 20.701,49.784 23.876,49.784 40.005,49.784 74.041,49.911 78.232,50.927 80.264,50.927 82.55,50.927 84.709,50.927 86.995,50.927 88.773,50.927 91.821,50.927 104.775,51.308 105.283,51.435 59.436,51.689 31.75,51.816 55.372,51.816 74.041,51.943 67.056,52.324 70.485,52.705 66.929,52.959 86.868,52.959 88.773,52.959 78.232,53.086 80.264,53.086 82.423,53.086 84.582,53.086 91.821,53.086 70.358,53.34 133.096,54.61 135.763,54.61 138.43,54.61 141.351,54.61 144.526,54.61 84.709,55.245 86.868,55.245 88.773,55.245 91.821,55.245 75.565,55.372 78.105,55.372 80.264,55.372 82.423,55.372 61.341,55.753 135.763,56.388 138.43,56.388 141.351,56.388 133.223,56.515 144.526,56.515 47.117,56.642 50.673,56.642 52.832,56.642 147.193,56.642 19.05,56.769 61.341,56.896 113.284,57.277 75.565,57.404 78.105,57.404 80.264,57.404 82.423,57.404 84.709,57.404 86.868,57.404 88.773,57.404 52.832,57.658 29.591,57.912 30.48,57.912 61.341,58.039 34.29,58.166 19.05,58.293 7.62,58.674 133.223,58.801 135.636,58.801 138.43,58.801 141.351,58.801 13.462,58.928 144.526,58.928 147.193,58.928 86.741,59.309 88.773,59.309 75.565,59.436 78.105,59.436 80.264,59.436 82.423,59.436 84.709,59.436 19.05,59.69 34.163,60.198 96.647,60.198 68.707,60.325 96.647,60.706 19.05,61.087 7.62,61.214 13.462,61.214 133.096,61.214 91.44,61.341 135.636,61.341 139.065,61.468 141.732,61.595 67.31,61.722 127.762,61.722 144.78,61.722 147.066,61.722 122.682,61.849 34.163,61.976 57.023,62.103 59.182,62.103 62.23,62.103 65.278,62.103 90.805,62.103 19.939,62.23 29.21,62.23 82.931,62.611 84.201,62.611 87.63,62.611 30.099,62.738 70.358,62.865 113.411,63.246 34.163,63.373 102.108,63.5 104.013,63.5 69.723,63.627 98.171,63.627 100.076,63.627 105.791,63.754 70.739,63.881 93.345,63.881 94.488,63.881 107.696,63.881 122.555,64.262 58.166,64.389 59.944,64.389 61.849,64.389 63.5,64.389 65.278,64.389 66.929,64.389 68.961,64.389 127.762,64.389 132.969,64.389 22.352,64.516 135.89,64.516 138.938,64.516 144.653,64.516 147.066,64.516 69.85,64.643 141.732,64.643 13.462,64.77 101.981,64.77 104.013,64.77 7.62,64.897 100.076,64.897 98.171,65.024 93.345,65.151 94.488,65.151 77.978,65.659 78.359,65.659 80.137,65.659 107.569,66.421 98.171,66.548 100.076,66.548 101.854,66.548 103.886,66.548 105.791,66.548 90.805,66.675 92.075,66.675 93.218,66.675 94.488,66.675 19.558,66.802 118.745,66.929 136.017,67.31 138.938,67.437 13.462,67.564 141.732,67.564 7.747,67.691 18.923,67.691 144.78,67.691 147.066,67.691 79.883,68.072 113.284,68.072 78.105,68.199 101.854,68.326 17.272,68.453 103.759,68.453 105.791,68.453 107.442,68.453 83.185,69.088 112.268,69.088 78.105,69.215 60.706,69.469 62.611,69.469 64.389,69.469 79.883,69.469 84.201,69.469 96.52,69.469 76.327,69.596 91.186,69.596 92.583,69.596 94.488,69.596 101.727,69.85 103.632,69.85 105.791,69.977 107.315,69.977 109.347,69.977 143.383,70.612 60.706,70.739 62.611,70.739 64.389,70.739 7.747,70.866 13.462,70.866 147.193,70.866 32.385,71.247 34.417,71.247 36.195,71.247 22.098,71.501 127.508,71.501 119.888,71.755 34.417,72.771 36.195,72.771 20.066,73.152 119.761,73.914 127.508,74.041 7.747,74.168 13.335,74.295 34.417,74.295 36.195,74.295 53.975,74.422 147.193,75.057 20.066,75.311 53.975,75.565 64.77,75.692 57.277,75.819 59.055,75.819 60.96,75.819 62.738,75.819 34.544,75.946 84.201,75.946 17.145,76.073 43.053,76.073 45.466,76.073 70.739,76.073 72.517,76.073 119.634,76.073 40.513,76.2 53.975,76.835 90.17,76.835 92.329,76.835 144.526,76.962 147.193,76.962 20.066,77.216 70.739,77.343 72.517,77.343 127.508,77.343 32.893,77.851 7.747,77.978 13.208,77.978 57.277,78.105 59.055,78.105 60.96,78.105 62.611,78.105 53.975,78.232 64.643,78.232 43.18,78.867 40.513,78.994 45.466,78.994 20.066,79.248 57.277,79.883 59.055,79.883 60.96,79.883 62.611,79.883 69.85,79.883 71.374,79.883 64.643,80.01 7.747,81.407 43.18,81.407 45.466,81.407 40.513,81.534 69.85,81.534 71.374,81.534 13.208,81.788 7.874,84.836 11.43,84.836 14.859,85.09 45.466,86.36 40.767,86.487 43.053,86.487 14.732,88.265 11.43,88.392 8.001,88.519 43.053,88.519 45.339,88.519 26.289,88.646 28.448,88.646 30.607,88.646 40.767,88.646 24.13,88.773 70.612,90.17 45.339,90.424 40.767,90.551 43.307,90.551 14.605,91.694 7.874,91.821 11.303,91.821 30.353,92.837 70.612,92.964 53.086,94.615 54.737,94.615 7.874,95.504 11.303,95.504 14.605,95.504 70.612,95.504 22.479,95.885 53.086,95.885 25.4,96.012 54.737,96.012 29.337,96.139 59.69,97.917 61.214,97.917 22.479,98.044 25.4,98.044 29.337,98.044 11.303,98.933 14.732,98.933 52.07,102.489 14.859,102.87 52.07,104.775
DO1: R77.1 U3.38 | length 65.7
  Top Layer w0.254: R77.1@14.276,37.274 17.514,40.513 59.436,40.513 61.214,38.735 72.889,38.735 73.084,38.93 ; 73.088,38.925 74.606,40.443 U3.38@74.606,43.044
DO1-1: J8.1 RL1.3 | length 14.5
  Bottom Layer w1.5: RL1.3@6.656,13.716 14.53,5.842 J8.1@17.907,5.842
DO1-2: J8.2 RL1.4 | length 10.1
  Top Layer w1.5: RL1.4@14.276,11.176 16.181,9.271 19.05,9.271 21.717,6.604 J8.2@21.717,5.842
DO2: R80.1 U3.39 | length 56.3
  Top Layer w0.254: R80.1@25.452,37.274 25.452,38.914 26.416,39.878 58.928,39.878 60.833,37.973 73.025,37.973 75.106,40.054 U3.39@75.106,43.044
DO2-1: J8.3 RL2.3 | length 11.4
  Bottom Layer w1.5: RL2.3@17.55,13.716 17.907,13.716 25.527,6.096 J8.3@25.527,5.842
DO2-2: J8.4 RL2.4 | length 7.1
  Top Layer w1.5: RL2.4@25.17,11.176 29.337,7.009 J8.4@29.337,5.842
DO3: R102.1 U3.40 | length 46
  Top Layer w0.254: R102.1@36.247,37.274 36.247,38.406 37.084,39.243 58.501,39.243 60.355,37.389 73.457,37.389 75.606,39.538 U3.40@75.606,43.044
DO3-1: J8.5 RL3.3 | length 9.8
  Bottom Layer w1.5: RL3.3@28.444,13.716 33.147,9.013 J8.5@33.147,5.842
DO3-2: J8.6 RL3.4 | length 5.7
  Top Layer w1.5: RL3.4@36.064,11.176 36.957,10.283 J8.6@36.957,5.842
DO4: R98.1 U3.46 | length 38.5
  Top Layer w0.254: R98.1@47.042,37.274 47.042,37.4 48.195,38.553 58.293,38.553 60.092,36.754 77.387,36.754 78.606,37.973 U3.46@78.606,43.044
DO4-1: J8.7 RL4.3 | length 8.5
  Bottom Layer w1.5: RL4.3@39.337,13.716 40.767,12.286 J8.7@40.767,5.842
DO4-2: J8.8 RL4.4 | length 6.9
  Top Layer w1.5: J8.8@44.577,5.842 44.577,9.779 45.974,11.176 RL4.4@46.957,11.176
DO5: R123.1 U3.47 | length 28
  Top Layer w0.254: R123.1@57.785,37.148 57.975,36.957 58.674,36.957 59.512,36.119 78.029,36.119 79.106,37.196 79.106,40.767 U3.47@79.106,43.044
DO5-1: J8.9 J8.11 RL5.3 | length 17.7
  Bottom Layer w1.5: J8.9@48.387,5.842 48.387,8.382 49.309,9.304 ; RL5.3@50.231,13.716 50.231,10.226 49.309,9.304 ; J8.11@56.007,5.842 56.007,7.493 54.196,9.304 49.309,9.304
DO5-2: J8.10 J8.12 RL5.4 | length 21.2
  Top Layer w1.5: RL5.4@57.851,11.176 55.499,11.176 52.197,7.874 J8.10@52.197,5.842 52.197,3.937 53.086,3.048 58.928,3.048 59.817,3.937 J8.12@59.817,5.842